# Altium PCB PIN_3_Pcb.PcbDoc
Units mm, origin at the board's own origin, x right, y up, seen from the top; angles counter-clockwise.
Board outline 59.94 x 81.2 mm, 2 copper layers (Top Layer, Bottom Layer); 1 components, 4 nets, 14 pads, 0 vias.
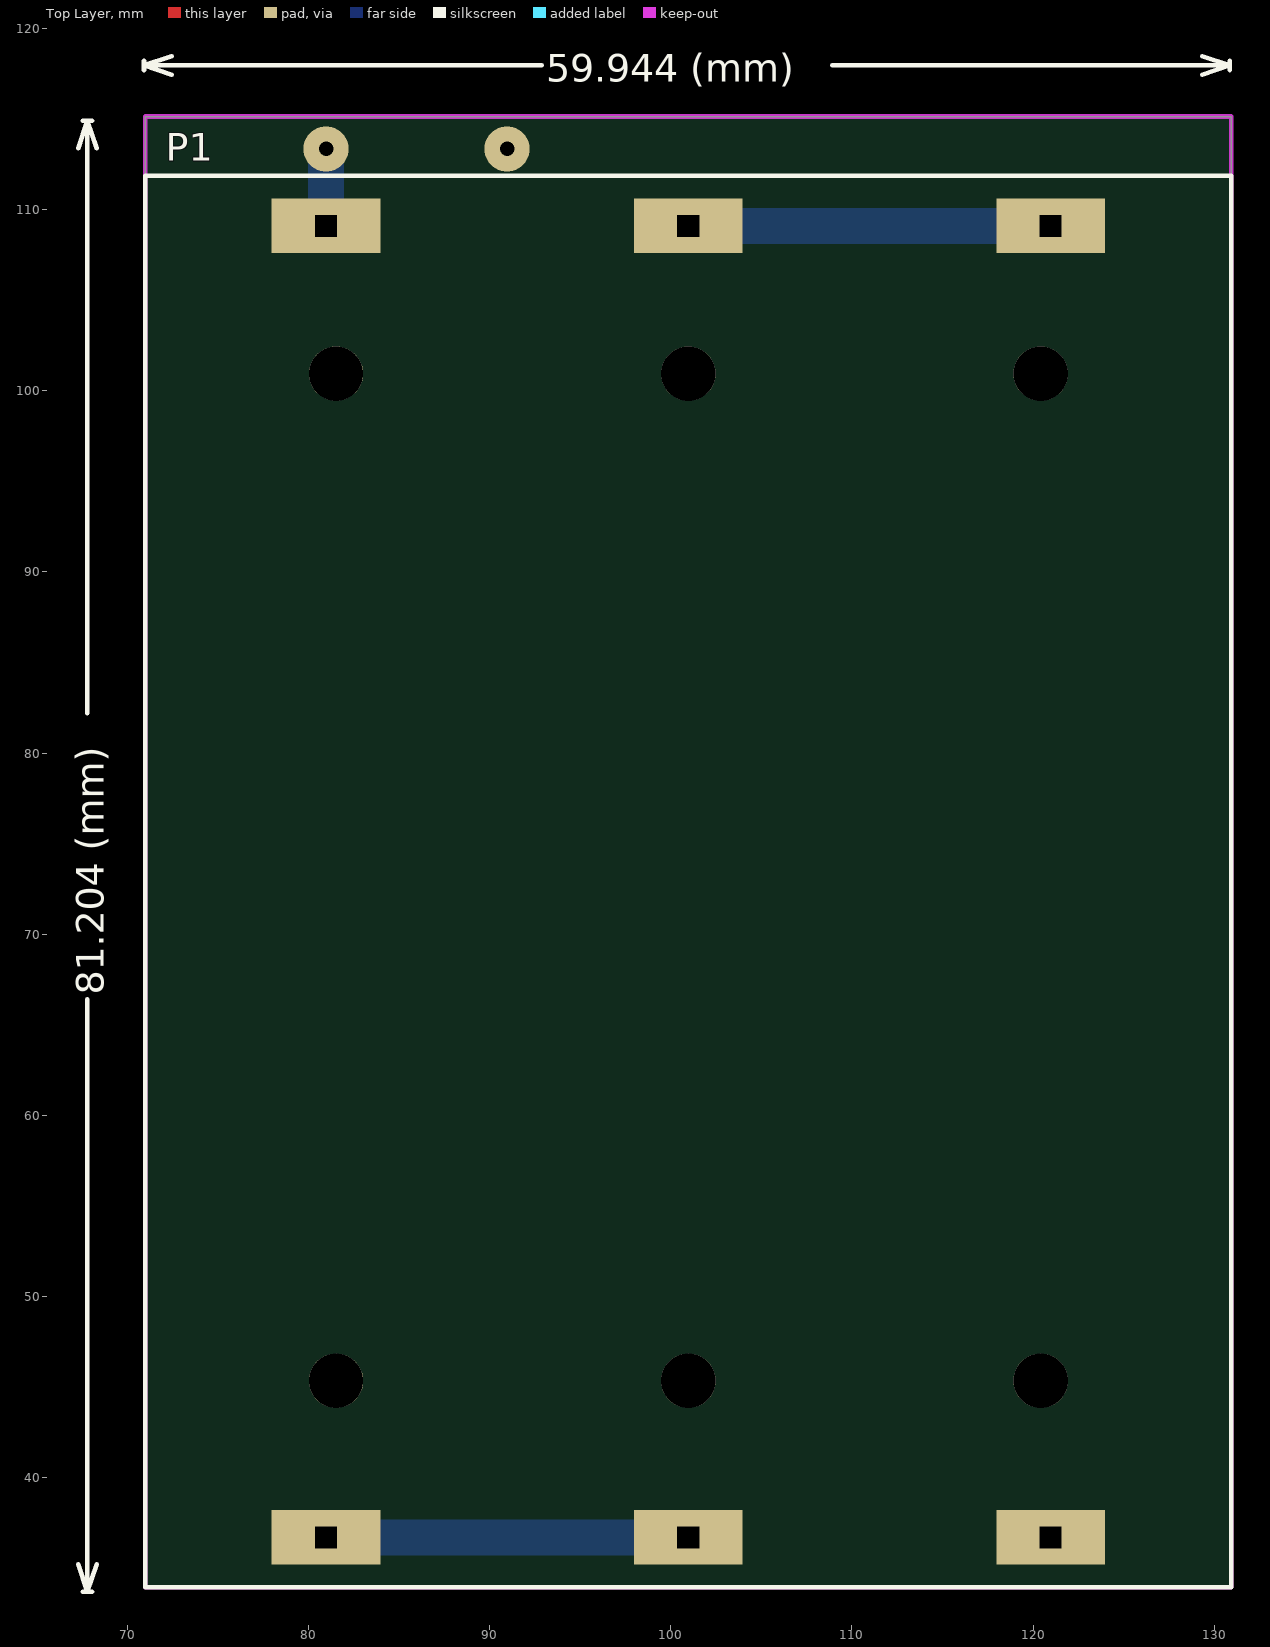
[diagram p0: Top Layer view]
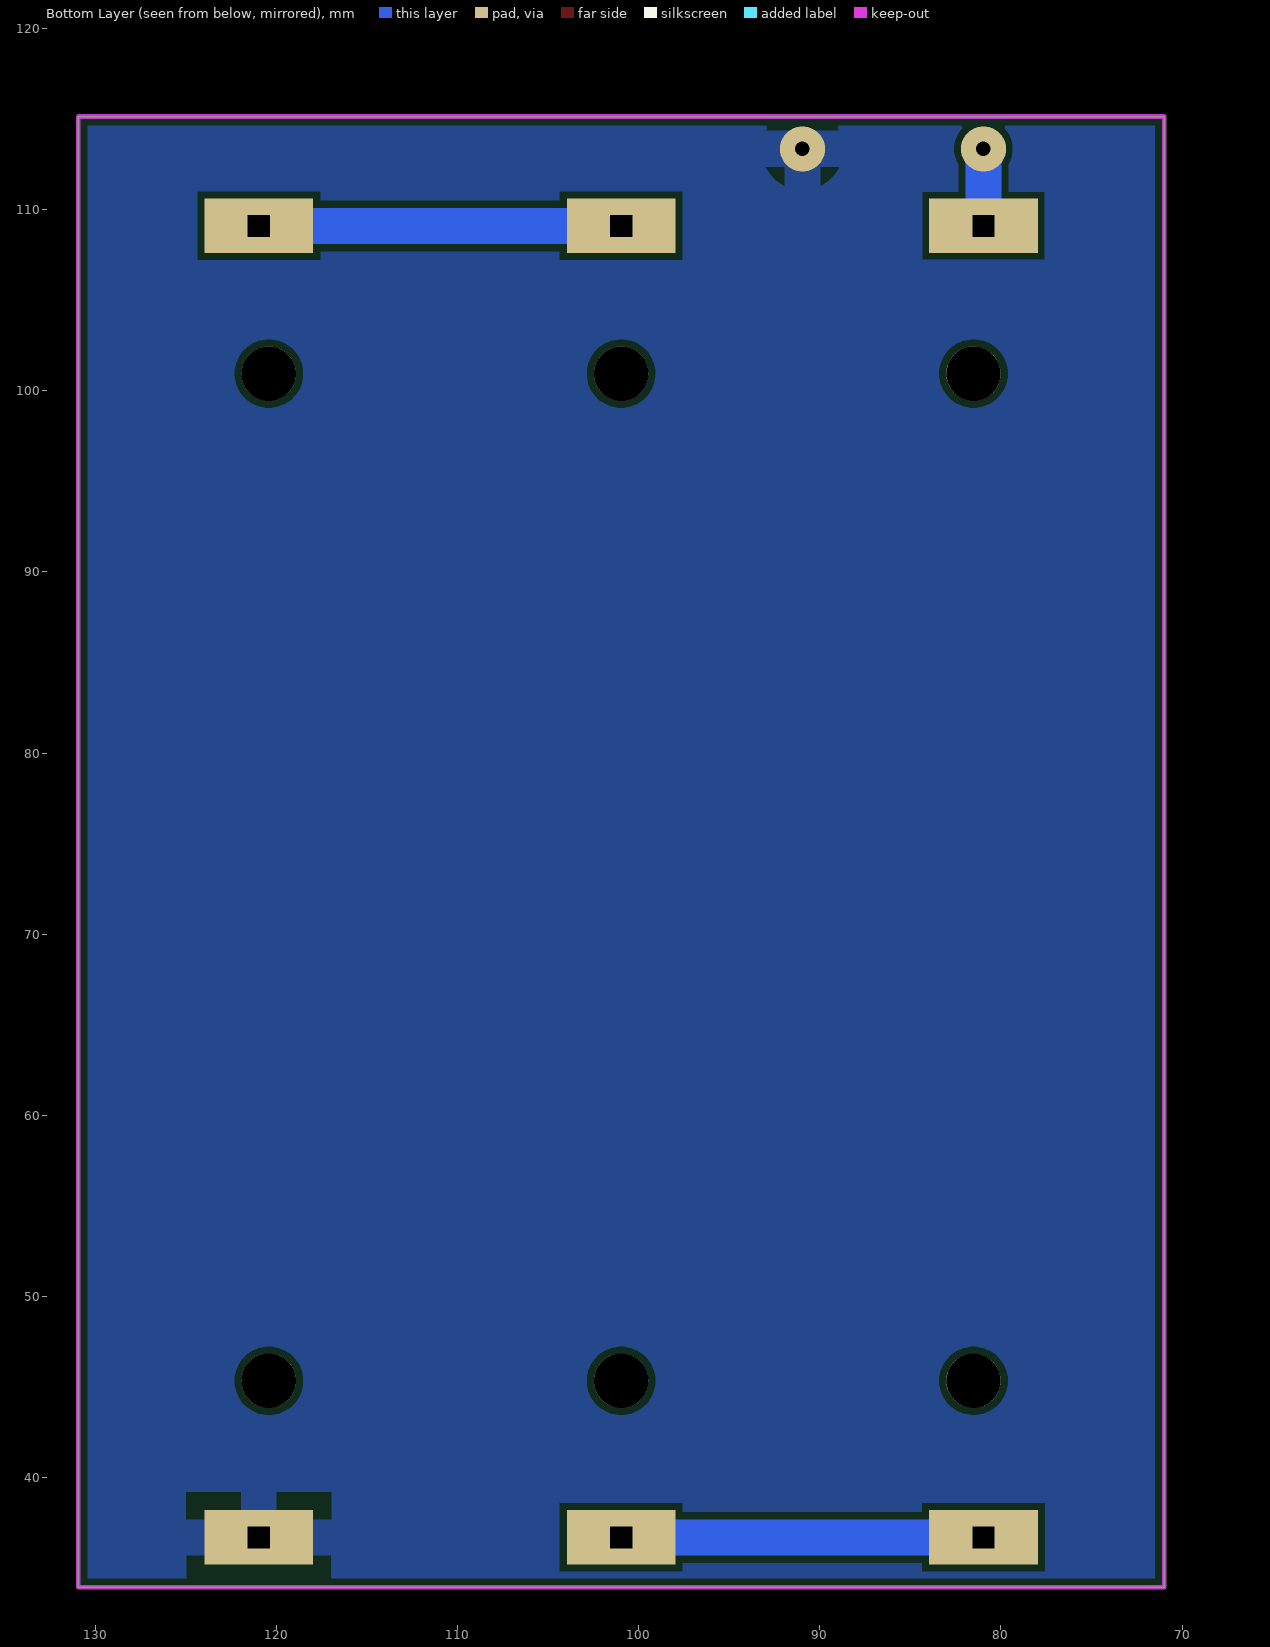
[diagram p1: Bottom Layer view, seen from below]

## Layer stack, top to bottom
Top Solder: solder mask 0.0102, Solder Resist, Dk 3.5
Top Layer: signal copper 0.0356
Dielectric 1: dielectric 0.32, FR-4, Dk 4.8
Bottom Layer: signal copper 0.0356
Bottom Solder: solder mask 0.0102, Solder Resist, Dk 3.5

## Board outline
70.993,33.934 70.993,115.138 130.937,115.138 130.937,33.934

## Design rules (kind name [scope] priority, off if disabled: settings)
Clearance [All] p1: gap=0.381 ignorepadtopadclearanceinfootprint=FALSE
PolygonConnect [All] p1: connectstyle=Relief reliefconductorwidth=2 reliefentries=4 polygonreliefangle="90 Angle" airgapwidth=1
RoutingVias [All] p1: holewidth=0.711 width=1.27 viastyle="Through Hole" minholewidth=0.711 minwidth=1.27 maxholewidth=0.711 maxwidth=1.27
SolderMaskExpansion [All] p1: expansion=0.102 istentingtop=FALSE
Width [All] p1: maxlimit=2 minlimit=0.254 preferedwidth=0.254 minimp=50.000000 maximp=50.000000 favimp=50.000000
30 further rules are at their usual default settings.

## Components (designator, comment, footprint, x,y, rotation, side; value= is the part's Value field where it differs from the comment)
P1 "18650x3" 18650x3 100.965,72.898 r0 top

## Footprints (in the part's own frame and the unit in brackets; to place one, negate y for a bottom-side part, rotate by r counter-clockwise, add the part's x,y. Pads: shape width x height; smd on the part's side, far side on the other; paste and mask are expansions set on the pad)
18650x3 [mm]
  rect 6x3 hole 1.2 square: 1(-20,36.2) 2(-20,-36.2) 3(0,-36.2) 4(0,36.2) 5(20,36.2) 6(20,-36.2)
  silkscreen extent -29.97,-38.96 29.97,38.96, body extent -30,-39 30,39, height 21.5

## Part data
P1: library part Power

## Free pads (board coordinates)
  round 3 hole 3: 28(120.415,45.343) 29(120.415,100.943) 30(100.965,45.343) 31(100.965,100.943) 32(81.515,100.943) 33(81.515,45.343)
  round 2.5 hole 0.8: TP1(80.965,113.35) TP2(90.957,113.35)

## Nets (pads, with @x,y where several pads share a name; then routed paths per layer and width w, separated by ;. In a path a pad name is that pad's centre, name@x,y a point inside that pad or via, vN(x,y) a via of type N, cw(c..) or ccw(c..) an arc to the next point about the centre after c; other vN are vias at no path point)
GND: P1.6 pad.TP2
NetP1_2: P1.2 P1.3 | length 20
  Bottom Layer w2: P1.2 P1.3
NetP1_4: P1.4 P1.5 | length 20
  Bottom Layer w2: P1.4 P1.5
VCC: P1.1 pad.TP1 | length 4.3
  Bottom Layer w2: P1.1 pad.TP1

## Polygon pours and split planes (outlines as drawn)
GND on Bottom Layer "NONET_L-01_P-001" (solid, pour order 0): 130.937,33.934 130.937,115.138 70.993,115.138 70.993,33.934

## Keep-outs
Keep-Out Layer:
  the board outline again, w0.254

## Silkscreen, mask and mechanical layers (free items; w line width, h text height)
Top Overlay:
  lines w0.254: 67.285,35.22 67.793,33.696 ; 67.285,113.375 67.793,114.899 ; 67.539,33.696 68.047,33.696 ; 67.539,114.899 68.047,114.899 ; 67.793,66.4 67.793,33.696 ; 67.793,82.194 67.793,114.899 ; 68.301,35.22 67.793,33.696 ; 68.301,113.375 67.793,114.899 ; 70.914,117.704 70.914,118.212 ; 72.438,117.45 70.914,117.958 ; 72.438,118.466 70.914,117.958 ; 92.862,117.958 70.914,117.958 ; 108.91,117.958 130.858,117.958 ; 129.334,117.45 130.858,117.958 ; 129.334,118.466 130.858,117.958 ; 130.858,117.704 130.858,118.212
  text "59.944 (mm)" at 93.116,117.043 h1.52
  text "81.204 (mm)" at 68.707,66.654 h1.52 r90